# Altium PCB Board_QFP.PcbDoc (part 2 of 4)
Units mm, origin at the board's own origin, x right, y up, seen from the top; angles counter-clockwise.
Board outline 237 x 100 mm, 2 copper layers (Top Layer, Bottom Layer); 389 components, 358 nets, 1412 pads, 469 vias.
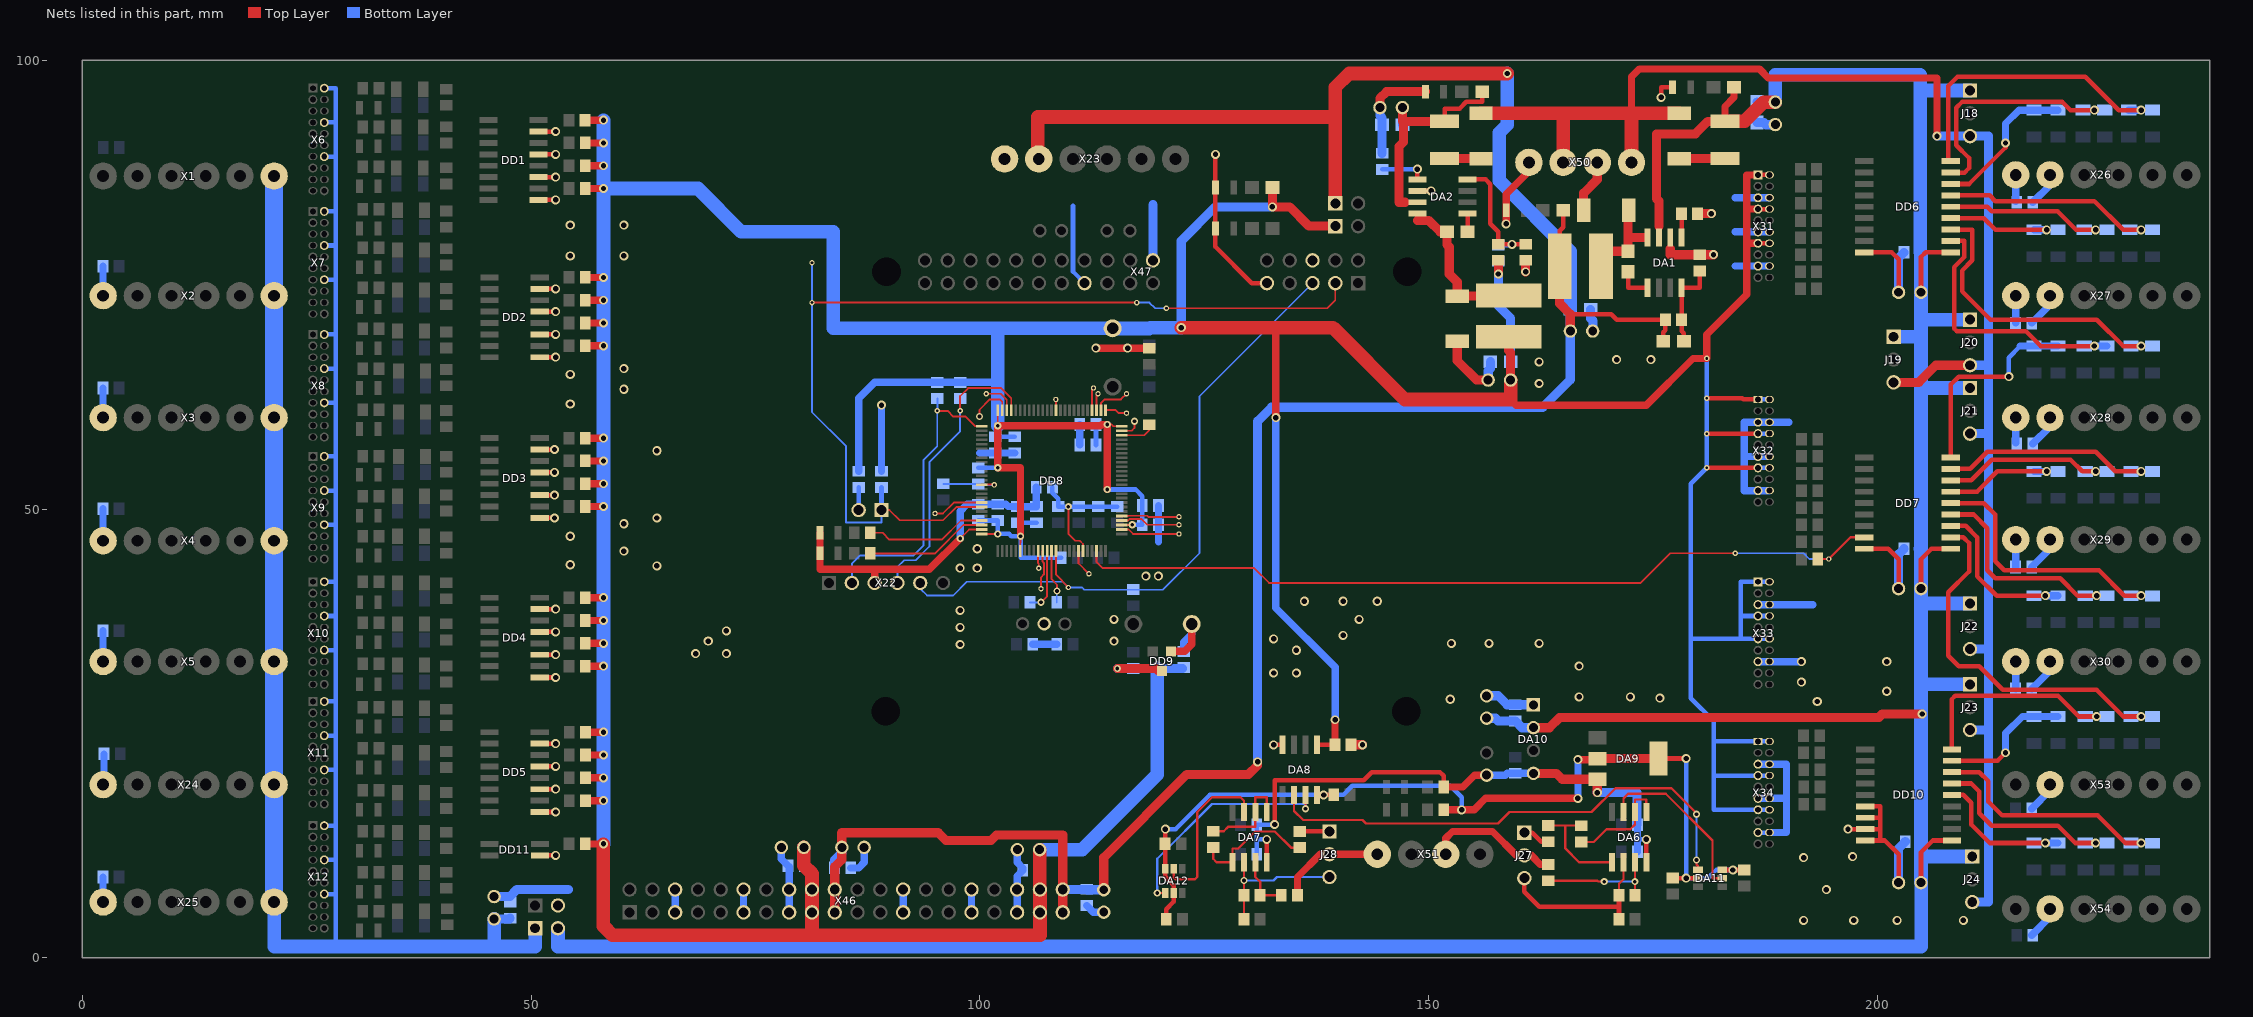
[diagram p2: the nets of this part, all layers, seen from the top]

## Via types
v1: diameter 0.6, hole 0.3, Top Layer to Bottom Layer, 149 vias
v2: diameter 0.813, hole 0.406, Top Layer to Bottom Layer, 130 vias
v3: diameter 1, hole 0.6, Top Layer to Bottom Layer, 118 vias
v4: diameter 1.016, hole 0.61, Top Layer to Bottom Layer, 72 vias

## Nets (pads, with @x,y where several pads share a name; then routed paths per layer and width w, separated by ;. In a path a pad name is that pad's centre, name@x,y a point inside that pad or via, vN(x,y) a via of type N, cw(c..) or ccw(c..) an arc to the next point about the centre after c; other vN are vias at no path point) (continued)
+3.3v: C5.1 C6.1 C15.2 C16.1 C17.1 C22.1 C23.1 C32.1 C33.1 C38.1 C39.1 C40.1 C41.1 C42.1 C43.1 C44.1 C45.1 C48.1 C59.1 DA8.1 DD8.6 DD8.28 DD8.50 DD8.75 DD8.100 DD9.3 J15.1 L2.1 R13.2 R14.2 R15.2 R28.2 R29.2 R30.2 R43.2 R44.2 R45.2 R58.2 R59.2 R60.2 R73.2 R74.2 R75.2 R125.2 R128.2 R130.2 R146.1 R148.2 R149.2 R150.2 R154.1 R171.2 R172.2 R197.2 R198.2 R199.2 R200.2 R206.2 SA2.2 X31.1 X31.2 X31.7 X31.8 X31.13 X31.14 X32.1 X32.2 X32.7 X32.8 X32.13 X32.14 X33.1 X33.2 X33.7 X33.8 X33.11 X33.12 X34.1 X34.2 X34.7 X34.8 X34.13 X34.14 X46.17 X46.18 X46.37 X46.38 | length 746.6
  Top Layer w0.203: DD8.100@100.181,47.239 101.976,47.239 v2(101.981,47.244) ; v2(101.981,59.309) DD8.75@101.981,61.039 ; DD8.6@104.481,45.339 104.481,46.268 104.521,46.308 v2(104.521,46.99) ; v2(114.173,59.436) 114.668,59.436 114.865,59.239 DD8.50@115.781,59.239 ; DD8.28@115.781,48.239 116.946,48.239 v2(116.967,48.26)
  Top Layer w0.508: DA8.1@137.541,23.749 C59.1@139.546,23.749 ; v1(180.975,54.61) X32.13@186.69,54.61 ; v1(180.975,58.42) X32.7@186.69,58.42 ; v1(180.975,62.357) 184.912,62.357 185.039,62.23 X32.1@186.69,62.23 ; X31.13@186.69,79.629 X31.14@187.96,79.629 ; X31.7@186.69,83.439 X31.8@187.96,83.439 ; X31.1@186.69,87.249 X31.2@187.96,87.249
  Top Layer w0.813: R13.2@55.998,93.352 v3@58.058,93.352 ; R200.2@56.025,12.707 58.058,12.707 v3(58.06,12.705) ; R171.2@56.025,32.519 58.058,32.519 v3(58.06,32.517) ; R75.2@56.025,35.059 58.058,35.059 v3(58.06,35.057) ; R74.2@56.025,37.599 58.058,37.599 v3(58.06,37.597) ; R73.2@56.025,40.139 58.058,40.139 v3(58.06,40.137) ; R60.2@56.025,50.299 58.058,50.299 v3(58.06,50.297) ; R59.2@56.025,52.839 58.058,52.839 v3(58.06,52.837) ; R58.2@56.025,55.379 58.058,55.379 v3(58.06,55.377) ; R45.2@56.025,57.919 58.058,57.919 v3(58.06,57.917) ; R44.2@56.025,68.206 58.058,68.206 v3(58.06,68.204) ; R43.2@56.025,70.746 v3(58.058,70.746) ; R30.2@56.025,73.286 58.058,73.286 v3(58.06,73.284) ; R29.2@56.025,75.826 58.058,75.826 v3(58.06,75.824) ; R28.2@56.025,85.732 58.058,85.732 v3(58.06,85.73) ; R15.2@56.025,88.272 58.058,88.272 v3(58.06,88.27) ; R14.2@56.025,90.812 58.058,90.812 v3(58.06,90.81) ; R199.2@56.05,17.531 v3(58.06,17.531) ; R198.2@56.05,20.071 v3(58.06,20.071) ; R197.2@56.05,22.611 v3(58.06,22.611) ; R172.2@56.05,25.151 v3(58.06,25.151) ; v2(104.521,46.99) 104.521,54.61 v2(101.981,54.61) v2(101.981,59.309) 113.411,59.309 113.538,59.436 v2(114.173,59.436) v2(114.173,52.197) ; v3(132.969,60.198) 132.969,70.231 ; C59.1@139.548,23.751 v3@139.548,26.518 ; 159.132,62.23 159.767,61.595 174.244,61.595 179.451,66.802 v1(180.975,66.802) 180.975,69.469 185.42,73.914 185.42,79.629 ; X31.13@186.69,79.629 185.42,79.629 ; X31.7@186.69,83.439 185.42,83.439 ; X31.1@186.69,87.249 185.42,87.249 185.42,83.439 ; 185.42,79.629 185.42,83.439
  Top Layer w1.016: v2(115.316,32.258) 119.634,32.258 119.939,31.953 DD9.3@120.269,31.953 ; R125.2@132.588,85.852 v3(132.588,83.693) 134.503,83.693 136.657,81.539 J15.1@139.594,81.539 ; v3(157.755,76.205) 157.757,76.207 R128.2@157.757,77.732 ; L2.1@158.898,69.22 158.898,67.696 159.132,67.462 C17.1@159.132,64.394
  Top Layer w1.524: v3@58.039,12.684 58.039,3.556 59.055,2.54 81.28,2.54 ; C22.1@80.371,12.319 80.371,10.307 81.28,9.398 X46.18@81.28,7.62 X46.17@81.28,5.08 81.28,2.54 ; X46.38@106.66,7.64 C6.1@106.66,12.065 ; X46.38@106.68,7.62 X46.37@106.68,5.08 106.68,2.54 81.28,2.54 ; v4(122.428,70.231) 132.969,70.231 139.321,70.231 147.322,62.23 159.132,62.23 C17.1@159.132,64.394
  Bottom Layer w0.508: C42.1@99.824,48.743 C43.1@101.983,48.743 v2@101.983,47.246 ; R150.2@99.824,54.607 101.978,54.607 v2(101.981,54.61) ; v2(101.981,47.244) 103.251,47.244 103.505,46.99 v2(104.521,46.99) ; C40.1@101.981,58.064 C41.1@103.884,58.064 ; C32.1@104.521,48.11 v2(104.521,46.99) ; C32.1@104.521,48.489 C33.1@106.301,48.489 ; R146.1@109.066,44.577 104.521,44.577 v2(104.521,46.99) ; C39.1@112.928,57.152 C38.1@112.928,59.438 ; C38.1@112.93,59.436 v2(114.173,59.436) ; v2(114.173,52.197) 117.348,52.197 118.085,51.46 C45.1@118.085,50.417 C44.1@118.085,48.258 118.083,48.26 v2(116.967,48.26) ; v1(180.975,66.802) v1(180.975,62.357) v1(180.975,58.42) v1(180.975,54.61) 179.197,52.832 179.197,35.56 ; 181.864,20.32 X34.7@186.69,20.32 X34.8@187.96,20.32 ; X32.13@186.69,54.61 X32.14@187.96,54.61 ; X32.7@186.69,58.42 X32.8@187.96,58.42 ; X32.1@186.69,62.23 X32.2@187.96,62.23 ; X34.14@187.96,16.51 X34.13@186.69,16.51 181.737,16.51 181.737,24.13 ; X34.2@187.96,24.13 X34.1@186.69,24.13 181.737,24.13 ; X33.12@187.96,35.56 X33.11@186.69,35.56 184.785,35.56 ; X33.8@187.96,38.1 X33.7@186.69,38.1 184.785,38.1 ; X33.2@187.96,41.91 X33.1@186.69,41.91 184.785,41.91 184.785,38.1 ; 179.197,35.56 179.197,28.956 181.737,26.416 181.737,24.13 ; 179.197,35.56 184.785,35.56 ; 184.785,35.56 184.785,38.1
  Bottom Layer w0.813: R206.2@86.489,54.226 86.489,62.359 88.262,64.132 R148.2@95.252,64.132 R149.2@97.792,64.132 101.978,64.132 ; C40.1@101.981,58.064 v2(101.981,59.309) ; v3(132.969,60.198) 132.969,38.989 139.573,32.385 v3(139.573,26.543)
  Bottom Layer w1.016: C23.1@80.416,10.289 C22.1@80.416,12.274 ; C5.1@106.578,9.781 106.66,9.863 C6.1@106.66,12.065 ; v2(115.316,32.258) R130.2@117.089,32.258 ; R130.2@117.092,32.261 119.761,32.261 C48.1@122.585,32.261 ; v4(122.428,70.231) 122.428,79.883 126.238,83.693 v3(132.588,83.693) ; C15.2@157.755,77.63 v3(157.755,76.205) 157.755,72.649 159.132,71.272 C17.1@159.132,64.394
  Bottom Layer w1.524: v3(58.06,12.705) v3(58.06,17.531) v3(58.06,20.071) v3(58.06,22.611) v3(58.06,25.151) v3(58.06,32.517) v3(58.06,35.057) v3(58.06,37.597) v3(58.06,40.137) v3(58.06,50.297) v3(58.06,52.837) v3(58.06,55.377) v3(58.06,57.917) v3(58.06,68.204) v3(58.06,73.284) v3(58.06,75.824) v3(58.06,85.73) ; v3(58.06,93.35) v3(58.06,90.81) v3(58.06,88.27) v3(58.06,85.73) ; v2(101.981,59.309) 101.981,70.153 83.644,70.153 83.644,80.899 73.406,80.899 68.575,85.73 v3(58.06,85.73) ; 102.03,70.153 SA2.2@114.779,70.153 ; C6.1@106.66,12.065 111.379,12.065 119.761,20.447 119.761,32.261 ; SA2.2@114.803,70.129 R154.1@118.87,70.129 ; R154.1@118.972,70.231 v4(122.428,70.231)
+5v: C11.1 C12.1 C13.1 C21.1 C27.1 C53.1 C54.1 J14.1 L1.1 R122.1 R124.2 X23.5 X46.19 X46.20 X46.39 X46.40 | length 286
  Top Layer w0.508: L1.1@164.592,77.089 164.592,81.01 164.994,81.412 R124.2@164.994,83.317 ; 165.776,71.74 170.348,71.74 170.968,71.12 R122.1@176.376,71.12 ; C13.1@176.149,68.707 176.149,69.723 176.378,69.952 R122.1@176.378,71.122
  Top Layer w1.016: X46.19@83.82,5.08 X46.20@83.82,7.62 83.82,10.16 84.602,10.942 C27.1@84.602,12.319 84.602,13.95 95.357,13.95 96.226,13.081 101.219,13.081 101.854,13.716 109.22,13.716 X46.40@109.22,7.62 X46.39@109.22,5.08 ; C12.1@113.792,7.6 113.792,11.176 123.063,20.447 129.921,20.447 130.937,21.463 v3(130.937,21.844) ; L1.1@164.592,77.089 164.592,72.924 165.776,71.74 C21.1@165.776,69.855
  Top Layer w1.524: X23.5@106.447,89.133 106.447,93.705 139.594,93.705 ; J14.1@139.594,84.079 139.594,93.705 ; v3(158.75,98.552) 141.139,98.552 139.594,97.007 139.594,93.705
  Bottom Layer w1.016: C53.1@83.795,10.031 83.795,10.897 84.602,11.704 C27.1@84.602,12.319 ; X46.40@109.245,7.645 C54.1@111.885,7.645 111.93,7.6 C12.1@113.792,7.6 ; v3(130.937,21.844) 130.937,59.804 132.489,61.356 162.702,61.356 165.776,64.43 C21.1@165.776,69.855 ; C21.1@165.756,69.875 C11.1@165.756,72.268
  Bottom Layer w1.524: v3(158.75,98.552) 158.75,92.837 157.861,91.948 157.861,86.614 165.756,78.719 C11.1@165.756,72.268
+5V_1: C60.1 C63.1 C64.1 C65.1 C66.1 DA8.8 DA9.2 DA9.4 DA11.2 DA11.6 DA12.2 DA12.6 R139.1 | length 104.8
  Top Layer w0.508: C66.1@120.625,12.702 120.625,9.042 121.6,8.067 DA12.2@121.6,7.239 121.6,6.284 120.752,5.436 C65.1@120.752,4.32 ; C66.1@120.65,12.727 v3(120.65,14.351) ; v3(138.303,18.161) C60.1@139.419,18.161 ; DA9.4@175.597,22.225 v3(178.689,22.225) ; C64.1@177.167,8.915 177.192,8.89 v3(178.689,8.89) DA11.2@180.006,8.89 ; DA11.6@182.706,9.84 182.742,9.804 v3(183.896,9.804) C63.1@185.168,9.804
  Top Layer w0.813: R139.1@151.663,16.508 155.065,16.508 156.337,17.78 v3(166.624,17.78) ; v3(166.624,22.098) DA9.2@168.67,22.098
  Top Layer w1.016: DA9.2@168.783,22.211 DA9.4@175.583,22.211
  Bottom Layer w0.508: v3(120.65,14.351) 121.793,14.351 125.603,18.161 v3(138.303,18.161) 140.462,18.161 141.478,19.177 152.4,19.177 153.67,17.907 v3(153.67,16.51) ; v3(178.689,22.225) v3(178.689,8.89) 181.102,8.89 182.016,9.804 v3(183.896,9.804)
  Bottom Layer w0.813: v3(166.624,17.78) v3(166.624,22.098)
+12V_1: C25.1 C55.1 C56.1 C57.1 C58.1 C62.1 DA6.8 DA7.8 DA9.3 DA10.4 R140.1 | length 68.6
  Top Layer w0.508: DA7.8@131.953,10.668 v3(131.953,13.208) ; v3(132.836,14.874) 132.842,14.88 132.842,19.812 142.748,19.812 143.637,20.701 151.257,20.701 151.663,20.295 R140.1@151.663,19.048 ; DA6.8@174.244,10.668 v3(174.244,13.208)
  Top Layer w0.813: R140.1@151.663,19.048 153.795,19.048 155.108,20.361 C25.1@156.459,20.361
  Top Layer w1.016: DA10.4@161.671,20.574 164.211,20.574 164.874,19.911 DA9.3@168.783,19.911 v3(168.783,18.415)
  Bottom Layer w0.508: C56.1@130.835,11.559 C55.1@130.835,14.861 132.823,14.861 v3(132.836,14.874) ; 130.837,13.208 v3(131.953,13.208) ; 173.253,13.208 v3(174.244,13.208)
  Bottom Layer w0.813: C25.1@156.459,20.361 158.537,20.361 158.746,20.57 C62.1@159.636,20.57 DA10.4@161.667,20.57 ; C57.1@173.253,11.813 173.253,13.208 C58.1@173.253,14.861
  Bottom Layer w1.016: v3(168.783,18.415) 173.228,18.415 C58.1@173.228,14.886
+24-in: J18.3 J19.3 J20.3 J21.3 J22.3 J23.3 J24.3 VD34.2 VD35.2 X50.1 X50.3 | length 188.8
  Top Layer w0.813: 172.593,94.107 172.593,98.171 173.482,99.06 186.817,99.06 187.833,98.044 206.629,98.044 v3(206.629,91.567)
  Top Layer w1.016: J19.3@201.803,64.135 204.597,64.135 206.502,66.04 J20.3@210.312,66.04
  Top Layer w1.524: VD35.2@155.829,94.107 164.973,94.107 ; X50.3@164.973,88.646 164.973,94.107 ; X50.1@172.593,88.646 172.593,94.107 ; VD34.2@177.927,94.107 172.593,94.107 ; 164.973,94.107 172.593,94.107
  Bottom Layer w1.016: v3(206.629,91.567) J18.3@210.312,91.567 212.365,91.567 212.365,66.04 ; J23.3@210.312,25.4 212.365,25.4 ; J22.3@210.312,34.417 212.365,34.417 ; J21.3@210.312,58.42 212.365,58.42 ; J20.3@210.312,66.04 212.365,66.04 ; J24.3@210.566,6.223 212.344,6.223 212.365,6.244 212.365,25.4 ; 212.365,25.4 212.365,34.417 ; 212.365,34.417 212.365,58.42 ; 212.365,58.42 212.365,66.04
+24_3: C19.1 C20.1 DA2.7 FU2.1 R126.2 | length 26.4
  Top Layer w0.508: 147.341,84.206 DA2.7@148.738,84.206 ; FU2.1@151.765,93.218 151.765,94.62 153.437,94.62 154.199,95.382 155.977,95.382 R126.2@155.977,96.525
  Top Layer w1.016: C19.1@147.067,94.747 147.067,93.243 147.087,93.223 147.204,93.223 ; 147.341,84.206 146.706,84.206 146.706,90.429 147.204,90.927 147.204,93.223 ; FU2.1@151.765,93.218 147.209,93.218 147.204,93.223
  Bottom Layer w1.016: C20.1@147.087,92.842 C19.1@147.087,94.727
+24_5: 
+24v: C1.1 C2.1 C3.1 C4.1 C7.1 C9.1 C10.1 C24.1 C50.1 C61.1 DA1.7 DA10.2 DD6.10 DD7.10 DD10.10 FU1.1 J18.1 J19.1 J20.1 J21.1 J22.1 J23.1 J24.1 R121.2 X21.2 | length 410.3
  Top Layer w0.508: DA1.7@175.641,80.264 175.641,81.534 ; C7.1@204.852,8.387 204.852,11.796 206.142,13.086 DD10.10@208.301,13.086 ; C3.1@204.852,41.153 204.852,44.435 206.015,45.598 DD7.10@208.174,45.598 ; C2.1@204.852,74.173 204.852,78.106 205.364,78.618 DD6.10@208.174,78.618
  Top Layer w0.813: FU1.1@183.007,93.218 183.007,94.869 184.023,95.885 R121.2@184.023,97.028
  Top Layer w1.016: DA10.2@161.671,25.654 163.449,25.654 164.592,26.797 200.152,26.797 200.533,27.178 v3(204.974,27.178) ; 175.641,81.534 175.641,84.333 175.387,84.587 175.387,91.821 179.705,91.821 181.102,93.218 FU1.1@183.007,93.218
  Top Layer w1.524: FU1.1@183.007,93.218 185.196,93.218 187.34,95.362 C10.1@188.616,95.362
  Bottom Layer w1.016: C24.1@156.459,26.711 157.439,26.711 157.738,26.412 C61.1@159.636,26.412 160.394,25.654 DA10.2@161.671,25.654 ; C9.1@186.604,95.362 C10.1@188.616,95.362
  Bottom Layer w1.524: X21.2@52.98,3.307 52.98,1.27 204.867,1.27 C7.1@204.867,8.372 ; C10.1@188.616,95.362 188.616,98.404 188.595,98.425 204.745,98.425 ; J19.1@201.803,69.215 204.725,69.215 ; C1.1@204.77,78.62 204.77,96.647 ; 204.77,98.273 204.77,96.647 ; C7.1@204.852,8.387 204.852,11.303 ; C1.1@204.852,78.538 C2.1@204.852,74.173 204.852,71.12 ; J23.1@210.312,30.48 204.852,30.48 ; J22.1@210.312,39.497 204.852,39.497 ; J21.1@210.312,63.5 204.852,63.5 ; J20.1@210.312,71.12 204.852,71.12 ; J18.1@210.312,96.647 204.77,96.647 ; J24.1@210.566,11.303 204.852,11.303 ; 204.852,11.303 204.852,30.48 ; 204.852,30.48 204.852,39.497 ; 204.852,39.497 C3.1@204.852,41.153 204.852,45.518 C4.1@204.77,45.6 204.852,45.682 204.852,63.5 ; 204.852,63.5 204.852,71.12
+24v_1: C51.1 C52.1 X1.1 X2.1 X3.1 X4.1 X5.1 X6.2 X6.8 X6.14 X7.2 X7.8 X7.14 X8.2 X8.8 X8.14 X9.2 X9.8 X9.14 X10.2 X10.8 X10.14 X11.2 X11.8 X11.14 X12.2 X12.8 X12.14 X21.1 X24.1 X25.1 | length 244
  Bottom Layer w0.508: X12.14@26.945,7.117 28.215,7.117 ; X12.8@26.945,10.927 28.215,10.927 ; X12.2@26.945,14.737 28.215,14.737 ; X11.14@26.945,20.96 28.215,20.96 ; X11.8@26.945,24.77 28.215,24.77 ; X11.2@26.945,28.58 28.215,28.58 ; X10.14@26.945,34.295 28.215,34.295 ; X10.8@26.945,38.105 28.215,38.105 ; X10.2@26.945,41.915 28.215,41.915 ; X9.14@26.945,48.265 28.215,48.265 ; X9.8@26.945,52.075 28.215,52.075 ; X9.2@26.945,55.885 28.215,55.885 ; X8.14@26.945,61.854 28.215,61.854 ; X8.8@26.945,65.664 28.215,65.664 ; X8.2@26.945,69.474 28.215,69.474 ; X7.14@26.945,75.57 28.215,75.57 ; X7.8@26.945,79.38 28.215,79.38 ; X7.2@26.945,83.19 28.215,83.19 ; X6.14@26.945,89.286 28.215,89.286 ; X6.8@26.945,93.096 28.215,93.096 ; X6.2@26.945,96.906 28.215,96.906 28.215,93.096 ; 28.215,1.402 28.215,7.117 ; 28.215,7.117 28.215,10.927 ; 28.215,10.927 28.215,14.737 ; 28.215,14.737 28.215,20.96 ; 28.215,20.96 28.215,24.77 ; 28.215,24.77 28.215,28.58 ; 28.215,28.58 28.215,34.295 ; 28.215,34.295 28.215,38.105 ; 28.215,38.105 28.215,41.915 ; 28.215,41.915 28.215,48.265 ; 28.215,48.265 28.215,52.075 ; 28.215,52.075 28.215,55.885 ; 28.215,55.885 28.215,61.854 ; 28.215,61.854 28.215,65.664 ; 28.215,65.664 28.215,69.474 ; 28.215,69.474 28.215,75.57 ; 28.215,75.57 28.215,79.38 ; 28.215,79.38 28.215,83.19 ; 28.215,83.19 28.215,89.286 ; 28.215,89.286 28.215,93.096
  Bottom Layer w1.016: C51.1@45.868,4.343 47.566,4.343 C52.1@47.648,4.425
  Bottom Layer w1.524: X25.1@21.357,6.228 21.357,1.275 45.868,1.275 ; C51.1@45.868,4.343 45.868,1.275 ; X21.1@50.44,3.307 50.44,1.275 45.868,1.275
  Bottom Layer w2: X5.1@21.336,33.025 X1.1@21.336,87.127 ; X25.1@21.357,6.228 X24.1@21.357,19.309 X5.1@21.357,33.025
A_: DA8.7 DA12.1 | length 25.8
  Top Layer w0.254: v2(119.761,7.239) DA12.1@120.65,7.239 ; v2(136.271,16.637) DA8.7@136.271,18.161
  Bottom Layer w0.254: v2(119.761,7.239) 119.761,11.049 125.857,17.145 136.271,17.145 v2(136.271,16.637)
B_: DA8.6 DA11.1 | length 56.6
  Top Layer w0.254: DA8.6@135.001,18.161 135.001,16.383 136.017,15.367 142.621,15.367 143.002,14.986 157.734,14.986 159.004,16.256 168.148,16.256 170.815,18.923 177.038,18.923 179.959,16.002 v2(179.832,16.002) ; v2(179.832,10.922) 179.832,10.414 180.006,10.24 DA11.1@180.006,9.84 DA11.1@179.94,9.906
  Bottom Layer w0.254: v2(179.832,10.922) v2(179.832,16.002)
Boot_0: DD8.94 J13.1 R157.1 X47.3 | length 111.5
  Top Layer w0.203: v1(81.28,73.025) v1(117.475,73.025) ; J13.1@89.027,49.911 89.916,49.911 91.059,48.768 95.885,48.768 97.356,50.239 DD8.94@100.181,50.239 ; v1(120.777,72.39) 138.684,72.39 139.594,73.3 X47.3@139.594,75.189
  Bottom Layer w0.203: v1(81.28,77.47) v1(81.28,73.025) 81.28,60.833 85.09,57.023 85.09,48.514 89.027,48.514 J13.1@89.027,49.911 ; v1(117.475,73.025) 118.872,73.025 119.507,72.39 v1(120.777,72.39)
  Bottom Layer w0.508: J13.1@89.027,49.911 89.029,49.913 R157.1@89.029,52.426
d6-10: 
d6-11: DD6.11 R105.2 R106.2 | length 29.6
  Top Layer w0.508: DD6.11@208.174,79.888 209.672,79.888 209.677,79.883 209.677,78.105 208.534,76.962 208.534,70.13 208.814,69.85 216.535,69.85 218.205,68.18 v3(224.176,68.18)
  Bottom Layer w0.813: v3(224.176,68.18) R105.2@225.573,68.18
d6-12: DD6.12 R103.2 R104.2 | length 32.2
  Top Layer w0.508: DD6.12@208.174,81.158 210.561,81.158 210.561,77.724 209.423,76.586 209.423,74.295 212.593,71.125 224.43,71.125 227.375,68.18 v3(229.383,68.18)
d6-13: DD6.13 R101.2 R102.2 | length 12.6
  Top Layer w0.508: DD6.13@208.174,82.428 211.857,82.428 213.151,81.134 v3(218.842,81.134)
  Bottom Layer w0.813: R101.2@217.445,81.134 v3(218.842,81.134)
d6-14: DD6.14 R132.2 R133.2 | length 17.2
  Top Layer w0.508: DD6.14@208.174,83.698 212.238,83.698 212.746,83.19 220.064,83.19 222.12,81.134 v3(224.303,81.134)
d6-15: DD6.15 R97.2 R98.2 | length 22.8
  Top Layer w0.508: DD6.15@208.174,84.968 212.492,84.968 213.127,84.333 224.176,84.333 227.375,81.134 v3(229.383,81.134)
d6-16: DD6.16 R95.2 R96.2 | length 16.9
  Top Layer w0.508: DD6.16@208.174,86.238 210.206,86.238 214.27,90.302 v3(214.27,90.81)
  Bottom Layer w0.813: v3(214.27,90.81) 214.27,92.969 215.77,94.469 R95.2@217.445,94.469 R96.2@220.112,94.469
d6-17: DD6.17 R63.2@222.906,94.469 R94.2 | length 25.6
  Top Layer w0.508: DD6.17@208.174,87.508 209.698,87.508 210.206,88.016 210.206,89.133 208.788,90.551 208.788,94.742 209.423,95.377 220.599,95.377 221.507,94.469 v3(224.176,94.469)
d6-18: DD6.18 R77.2 R78.2 | length 33.3
  Top Layer w0.508: DD6.18@208.174,88.778 207.899,89.053 207.899,97.155 208.915,98.171 223.165,98.171 226.867,94.469 v3(229.383,94.469)
  Bottom Layer w0.813: R77.2@227.986,94.469 v3(229.383,94.469)
d7-11: DD7.11 R134.2 R135.2 | length 40.1
  Top Layer w0.508: DD7.11@208.174,46.868 209.571,46.868 210.206,46.233 210.206,43.058 207.899,40.751 207.899,33.655 209.042,32.512 211.328,32.512 213.972,29.868 224.412,29.868 227.375,26.905 v3(229.383,26.905)
d7-12: DD7.12 R119.2 R120.2 | length 17.7
  Top Layer w0.508: DD7.12@208.174,48.138 209.825,48.138 211.095,46.868 211.095,42.55 213.278,40.367 v3(218.715,40.367)
  Bottom Layer w0.813: v3(218.715,40.367) R119.2@220.112,40.367
d7-13: DD7.13 R117.2 R118.2 | length 22.8
  Top Layer w0.508: DD7.13@208.174,49.408 210.714,49.408 212.238,47.884 212.238,43.185 213.127,42.296 220.366,42.296 222.295,40.367 v3(224.43,40.367)
d7-14: DD7.14 R115.2 R116.2 | length 28.5
  Top Layer w0.508: DD7.14@208.174,50.678 211.857,50.678 213.127,49.408 213.127,44.201 214.143,43.185 224.684,43.185 227.502,40.367 v3(229.383,40.367)
d7-15: DD7.15 R113.2 R114.2 | length 13
  Top Layer w0.508: DD7.15@208.174,51.948 211.095,51.948 213.357,54.21 v3(218.842,54.21)
  Bottom Layer w0.813: R114.2@217.445,54.21 v3(218.842,54.21)
d7-16: DD7.16 R111.2 R112.2 | length 17.6
  Top Layer w0.508: DD7.16@208.174,53.218 210.46,53.218 212.746,55.504 221.509,55.504 222.803,54.21 v3(224.303,54.21)
d7-17: DD7.17 R109.2 R110.2 | length 22.9
  Top Layer w0.508: DD7.17@208.174,54.488 210.333,54.488 212.238,56.393 224.303,56.393 226.486,54.21 v3(229.383,54.21)
d7-18: DD7.18 R107.2 R108.2 | length 23.1
  Top Layer w0.508: DD7.18@208.174,55.758 208.174,63.902 209.042,64.77 v3(214.63,64.77)
  Bottom Layer w0.508: v3(214.63,64.77) 214.63,66.891 215.919,68.18
  Bottom Layer w0.813: 215.919,68.18 R108.2@217.445,68.18 R107.2@220.112,68.18
d10-14: DD10.14 R166.2 R167.2 | length 15.4
  Top Layer w0.508: DD10.14@208.301,18.166 209.571,18.166 210.46,17.277 210.46,14.864 212.516,12.808 v3(218.715,12.808)
  Bottom Layer w0.813: v3(218.715,12.808) R166.2@220.112,12.808
d10-15: DD10.15 R164.2 R165.2 | length 20.2
  Top Layer w0.508: DD10.15@208.301,19.436 210.46,19.436 211.349,18.547 211.349,16.134 212.746,14.737 220.112,14.737 222.041,12.808 v3(224.303,12.808)
d10-16: DD10.16 R162.2 R163.2 | length 25.7
  Top Layer w0.508: DD10.16@208.301,20.706 211.349,20.706 212.365,19.69 212.365,17.404 213.889,15.88 224.557,15.88 227.629,12.808 v3(229.383,12.808)
d10-17: DD10.17 R160.2 R161.2 | length 15.1
  Top Layer w0.508: DD10.17@208.301,21.976 213.381,21.976 v3(214.27,22.865)
  Bottom Layer w0.813: v3(214.27,22.865) 214.27,25.024 216.151,26.905 R161.2@217.445,26.905 R160.2@220.112,26.905
d10-18: DD10.18 R136.2 R159.2 | length 22.8
  Top Layer w0.508: DD10.18@208.301,23.246 208.301,28.85 208.661,29.21 220.117,29.21 222.422,26.905 v3(224.43,26.905)
da1-1: C14.1 DA1.1 | length 3.9
  Top Layer w0.508: C14.1@172.212,76.454 172.212,74.676 DA1.1@174.371,74.676
da1-4: C13.2 DA1.4 R122.2 R123.1 | length 10
  Top Layer w0.508: C13.2@178.435,68.707 178.435,69.596 178.181,69.85 DA1.4@178.181,74.676 180.213,74.676 180.211,74.678 R123.1@180.211,76.556
da1-5: DA1.5 J11.1 | length 2.6
  Top Layer w0.508: DA1.5@178.181,80.264 J11.1@178.181,82.908
da1-8: C14.2 DA1.8 L1.2 VD31.1 | length 9.7
  Top Layer w0.508: 173.99,80.264 DA1.8@174.371,80.264
  Top Layer w1.016: L1.2@169.251,78.74 C14.2@172.212,78.74 172.212,80.264 ; VD31.1@172.212,83.298 172.212,80.264 ; 173.99,80.264 172.212,80.264
da2-1: C18.1 DA2.1 | length 2
  Top Layer w0.508: C18.1@154.326,80.904 DA2.1@154.326,82.936
da2-4: C15.1 DA2.4 R127.1 R128.1 | length 14.4
  Top Layer w0.508: DA2.4@154.326,86.746 156.332,86.746 156.866,86.212 156.866,81.793 157.757,80.902 R128.1@157.757,79.532 R127.1@160.805,79.532
  Bottom Layer w0.508: C15.1@157.755,79.43 159.202,79.43 v3(159.279,79.507)
da2-5: DA2.5 J12.1 | length 5.1
  Top Layer w0.508: DA2.5@148.738,86.746 v3(148.738,87.889)
  Bottom Layer w0.508: J12.1@144.828,87.889 v3(148.738,87.889)
da2-8: C18.2 DA2.8 L2.2 VD40.1 | length 18
  Top Layer w0.508: 148.738,82.174 DA2.8@148.738,82.936
  Top Layer w1.016: 148.738,82.174 150.008,82.174 151.278,80.904 C18.2@152.04,80.904 152.04,79.481 152.294,79.227 152.294,76.205 153.183,75.316 VD40.1@153.183,73.752 158.83,73.752 L2.2@158.898,73.82
da6-1: DA6.1 DA6.2 R204.1 | length 12.2
  Top Layer w0.254: R204.1@167.003,12.929 168.377,12.929 169.799,14.351 172.466,14.351 172.974,14.859 DA6.2@172.974,16.256 172.974,17.653 174.244,17.653 DA6.1@174.244,16.256
da6-3: DA6.3 DA11.5 | length 19.1
  Top Layer w0.254: DA6.3@171.704,16.256 171.704,17.78 172.212,18.288 176.403,18.288 181.61,13.081 181.61,8.89 DA11.5@182.706,8.89
da6-5: DA6.5 R201.1 R204.2 | length 12.1
  Top Layer w0.254: R201.1@163.324,14.757 165.227,14.757 ; R204.2@166.975,14.757 165.227,14.757 ; DA6.5@170.434,10.668 166.751,10.668 165.227,12.192 165.227,14.757
da6-6: DA6.6 J27.3 R158.2 R205.2 | length 19.3
  Top Layer w0.254: R158.2@171.199,6.983 171.199,8.258 171.704,8.763 DA6.6@171.704,10.668
  Top Layer w0.508: J27.3@160.655,8.89 160.655,7.366 162.306,5.715 171.199,5.715 ; R205.2@171.199,4.316 171.199,5.715 ; R158.2@171.199,6.983 171.199,5.715
da6-7: DA6.7 R138.1 R158.1 | length 13.4
  Top Layer w0.254: R138.1@163.32,8.611 168.808,8.611 168.91,8.509 v2(169.545,8.509) ; R158.1@172.974,7.008 v2(172.974,8.509) DA6.7@172.974,10.668
  Bottom Layer w0.254: v2(169.545,8.509) v2(172.974,8.509)
da7-1: DA7.1 DA7.2 R203.1 | length 11.1
  Top Layer w0.254: R203.1@125.986,14.122 127.152,14.122 127.635,14.605 130.683,14.605 DA7.2@130.683,16.256 130.683,17.907 131.953,17.907 DA7.1@131.953,16.256
da7-3: DA7.3 DA12.5 | length 18.3
  Top Layer w0.254: DA12.5@121.6,9.939 121.6,8.956 121.793,8.763 123.952,8.763 124.206,9.017 124.206,16.256 125.857,17.907 129.032,17.907 129.413,17.526 DA7.3@129.413,16.256
da7-5: DA7.5 R202.1 R203.2 | length 14.1
  Top Layer w0.254: R203.2@125.986,12.322 125.986,11.047 126.365,10.668 DA7.5@128.143,10.668 128.143,12.192 128.778,12.192 130.683,14.097 132.842,14.097 134.645,12.294 R202.1@135.634,12.294
da7-6: DA7.6 J28.3 R141.2 R142.2 | length 16
  Top Layer w0.254: R142.2@129.413,6.986 v2(129.413,8.636) DA7.6@129.413,10.668 ; R141.2@129.416,4.316 R142.2@129.416,6.983
  Bottom Layer w0.254: v2(129.413,8.636) 132.715,8.636 133.096,9.017 J28.3@138.938,9.017
da7-7: DA7.7 R137.1 R142.1 | length 6.3
  Top Layer w0.254: DA7.7@130.683,10.668 130.683,9.017 131.216,8.484 R142.1@131.216,6.983 R137.1@133.575,6.983
fu1: FU1.2 VD34.1 | length 5.1
  Top Layer w1.016: VD34.1@177.927,89.067 FU1.2@182.996,89.067
fu2: FU2.2 VD35.1 | length 4.1
  Top Layer w1.016: FU2.2@151.765,89.078 VD35.1@155.818,89.078
gnd: C1.2 C2.2 C3.2 C4.2 C5.2 C6.2 C7.2 C9.2 C10.2 C11.2 C12.2 C16.2 C17.2 C19.2 C20.2 C21.2 C22.2 C23.2 C24.2 C27.2 C32.2 C33.2 C38.2 C39.2 C40.2 C41.2 C42.2 C43.2 C44.2 C45.2 C46.2 C47.2 C48.2 C50.2 C51.2 C52.2 C53.2 C54.2 C59.2 C61.2 DA1.6 DA2.6 DA8.4 DA10.1 DD1.9 DD1.11 DD1.13 DD1.15 DD2.9 DD2.11 DD2.13 DD2.15 DD3.9 DD3.11 DD3.13 DD3.15 DD4.9 DD4.11 DD4.13 DD4.15 DD5.9 DD5.11 DD5.13 DD5.15 DD6.9 DD7.9 DD8.49 DD8.74 DD8.99 DD9.1 DD10.6 DD10.7 DD10.8 DD10.9 DD11.3 J6.2 J7.2 J8.2 J9.2 J10.2 J11.2 J12.2 J16.2 J17.2 pad.0 R123.2 R127.2 R144.1 R156.2 R157.2 SA1.2 VD31.2 VD36.2 VD37.2 VD38.2 VD39.2 VD40.2 VD41.1 VD42.1 VD43.1 X22.3 X23.6 X26.5 X27.5 X28.5 X29.5 X30.5 X31.5 X31.6 X31.11 X31.12 X31.17 X31.18 X32.5 X32.6 X32.11 X32.12 X32.17 X32.18 X33.5 X33.6 X33.15 X33.16 X34.5 X34.6 X34.11 X34.12 X34.17 X34.18 X46.5 X46.6 X46.11 X46.12 X46.15 X46.16 X46.25 X46.26 X46.31 X46.32 X46.35 X46.36 X47.6 X47.9 X47.20 X47.25 X50.2 X50.4 X52.2 X53.5 X54.5 | length 383.5
  Top Layer w0.203: v2(97.79,46.736) 98.793,47.739 DD8.99@100.181,47.739 ; v2(99.949,60.325) 99.949,61.087 101.092,62.23 102.219,62.23 102.481,61.968 DD8.74@102.481,61.039 ; DD8.49@115.781,58.739 116.905,58.739 117.221,59.055 v2(117.221,59.817)
  Top Layer w0.305: 176.911,78.994 DA1.6@176.911,80.264
  Top Layer w0.508: DD1.9@50.821,84.46 v3(52.726,84.46) ; DD1.11@50.821,87 v3(52.726,87) ; DD1.13@50.821,89.54 v3(52.726,89.54) ; DD1.15@50.821,92.08 v3(52.726,92.08) ; DD5.9@50.948,16.261 v3(52.726,16.261) ; DD5.11@50.948,18.801 v3(52.726,18.801) ; DD5.13@50.948,21.341 v3(52.726,21.341) ; DD5.15@50.948,23.881 v3(52.726,23.881) ; DD4.9@50.948,31.247 v3(52.726,31.247) ; DD4.11@50.948,33.787 v3(52.726,33.787) ; DD4.13@50.948,36.327 v3(52.726,36.327) ; DD4.15@50.948,38.867 v3(52.726,38.867) ; DD3.9@50.948,49.027 v3(52.599,49.027) ; DD3.11@50.948,51.567 v3(52.599,51.567) ; DD3.13@50.948,54.107 v3(52.599,54.107) ; DD3.15@50.948,56.647 v3(52.599,56.647) ; DD2.9@50.948,66.934 v3(52.726,66.934) ; DD2.11@50.948,69.474 v3(52.726,69.474) ; DD2.13@50.948,72.014 v3(52.726,72.014) ; DD2.15@50.948,74.554 v3(52.726,74.554) ; DD11.3@50.954,11.435 v3(52.726,11.435) ; v3(126.238,89.535) VD38.2@126.238,85.852 VD43.1@126.238,81.28 126.238,79.248 130.297,75.189 X47.9@131.974,75.189 ; v3(132.715,23.749) DA8.4@133.731,23.749 ; DA2.6@148.738,85.476 v3(150.262,85.476) ; v3(175.895,95.885) 175.895,97.028 VD36.2@177.165,97.028 ; v3(196.723,14.351) 196.728,14.356 DD10.8@198.649,14.356 200.3,14.356 ; DD7.9@198.522,45.598 201.189,45.598 202.352,44.435 C3.2@202.352,41.153 ; DD6.9@198.522,78.618 201.57,78.618 202.352,77.836 C2.2@202.352,74.173 ; DD10.9@198.649,13.086 200.3,13.086 ; DD10.7@198.649,15.626 200.3,15.626 ; DD10.6@198.649,16.896 200.3,16.896 200.3,15.626 ; C7.2@202.352,8.387 202.352,11.542 200.808,13.086 200.3,13.086 ; 200.3,13.086 200.3,14.356 ; 200.3,14.356 200.3,15.626
  Top Layer w0.813: VD42.1@82.169,47.371 VD41.1@82.169,45.085 82.169,43.307 88.265,43.307 ; X22.3@88.265,41.783 88.265,43.307 ; v2(97.79,46.736) 94.361,43.307 88.265,43.307 ; v3(112.903,67.945) v3(116.459,67.945) 116.462,67.942 R156.2@118.87,67.942 ; DD9.1@121.285,34.163 122.809,34.163 123.594,34.948 SA1.2@123.594,37.211 ; v3(158.623,81.788) 158.644,81.809 VD37.2@158.644,83.317 158.644,85.111 161.163,87.63 X50.4@161.163,88.646
  Top Layer w1.016: C59.2@141.348,23.751 142.619,23.751 v3(142.621,23.749) ; C19.2@144.567,94.747 144.567,95.783 145.309,96.525 VD39.2@149.627,96.525 ; VD40.2@153.183,68.712 153.183,66.553 155.342,64.394 C17.2@156.632,64.394 ; v3(160.803,76.459) 160.805,76.461 R127.2@160.805,77.732 ; VD31.2@167.259,83.312 167.259,85.217 168.783,86.741 X50.2@168.783,88.646 ; 176.911,78.994 176.911,78.359 R123.2@180.208,78.359 ; J11.2@179.956,82.933 181.481,82.933 v3(181.483,82.931) ; R123.2@180.211,78.356 181.734,78.356 v3(181.737,78.359)
  Bottom Layer w0.508: 110.363,83.82 110.363,76.48 X47.25@111.654,75.189 ; X34.17@186.69,13.97 X34.18@187.96,13.97
  Bottom Layer w0.813: X46.5@66.04,5.08 X46.6@66.04,7.62 ; X46.11@73.66,5.08 X46.12@73.66,7.62 ; C22.2@77.871,12.319 77.871,11.034 C23.2@78.616,10.289 78.74,10.165 X46.16@78.74,7.62 X46.15@78.74,5.08 ; C53.2@85.595,10.031 86.485,10.031 87.102,10.648 C27.2@87.102,12.319 ; R157.2@89.029,54.226 v3@89.029,61.593 ; X46.25@91.44,5.08 X46.26@91.44,7.62 ; v2(97.79,46.736) 97.79,49.784 98.549,50.543 C42.2@99.824,50.543 C43.2@101.983,50.543 101.986,50.546 102.87,50.546 103.124,50.292 C32.2@104.139,50.292 ; X46.31@99.06,5.08 X46.32@99.06,7.62 ; 99.952,56.264 C40.2@101.725,56.264 C41.2@103.884,56.264 ; X46.35@104.14,5.08 X46.36@104.14,7.62 104.14,9.143 C5.2@104.778,9.781 104.778,10.03 104.14,10.668 C6.2@104.14,12.045 ; C32.2@104.142,50.289 C33.2@106.301,50.289 106.274,50.316 R144.1@106.274,52.449 ; C46.2@105.886,34.949 C47.2@108.555,34.949 ; C39.2@111.128,57.152 C38.2@111.128,59.438 ; C54.2@111.885,5.845 112.63,5.1 C12.2@113.792,5.1 ; C45.2@119.885,50.417 C44.2@119.885,48.258 119.885,46.358 119.888,46.355 ; C48.2@122.684,34.16 122.684,35.181 123.594,36.091 SA1.2@123.594,37.211 ; 184.15,77.089 X31.17@186.69,77.089 X31.18@187.96,77.089 ; 184.15,80.899 X31.11@186.69,80.899 X31.12@187.96,80.899 ; 184.15,84.709 X31.5@186.69,84.709 X31.6@187.96,84.709 ; X34.11@186.69,17.78 X34.12@187.96,17.78 189.865,17.78 ; X34.5@186.69,21.59 X34.6@187.96,21.59 189.865,21.59 189.865,17.78 ; X33.15@186.69,33.02 X33.16@187.96,33.02 v4@191.262,33.02 ; X33.5@186.69,39.37 X33.6@187.96,39.37 192.786,39.37 ; X34.18@187.96,13.97 189.865,13.97 189.865,17.78 ; X32.18@187.96,52.07 X32.17@186.69,52.07 185.166,52.07 185.166,55.88 ; X32.12@187.96,55.88 X32.11@186.69,55.88 185.166,55.88 ; 190.119,59.69 X32.6@187.96,59.69 X32.5@186.69,59.69 185.166,59.69 185.166,55.88 ; J17.2@217.188,2.543 219.223,4.578 X54.5@219.223,5.466 ; J16.2@217.188,16.64 X53.5@219.223,18.675 ; J10.2@217.188,29.975 X30.5@219.223,32.01 ; J9.2@217.188,43.564 219.223,45.599 X29.5@219.223,46.614 ; J7.2@217.188,70.742 219.223,72.777 X27.5@219.223,73.792 ; J8.2@217.315,57.28 219.223,59.188 X28.5@219.223,60.203 ; J6.2@217.315,84.204 219.223,86.112 X26.5@219.223,87.254 ; X53.5@219.223,18.421 X53.5@219.223,18.675 ; X53.5@219.223,19.309 X53.5@219.223,18.675 ; X30.5@219.223,31.883 X30.5@219.223,32.01 ; X30.5@219.223,33.025 X30.5@219.223,32.01
  Bottom Layer w1.016: C51.2@45.868,6.843 47.626,6.843 48.408,7.625 54.123,7.625 ; X47.20@119.274,77.729 119.274,83.926 ; C19.2@144.567,94.747 144.567,93.838 144.801,93.604 C20.2@144.801,92.842 ; J12.2@144.803,89.664 C20.2@144.803,92.84 ; C24.2@156.459,29.211 157.733,29.211 158.732,28.212 C61.2@159.636,28.212 DA10.1@161.653,28.212 ; C17.2@156.632,64.394 156.632,65.43 156.866,65.664 C16.2@156.866,66.426 ; C11.2@168.042,72.268 168.042,71.252 168.296,70.998 C21.2@168.296,69.875 ; C9.2@186.584,93.096 187.346,93.096 187.6,92.842 C10.2@188.596,92.842 ; C7.2@202.352,8.387 202.352,12.216 C50.2@203.097,12.961 ; C3.2@202.352,41.153 202.352,44.982 C4.2@202.97,45.6 ; C2.2@202.352,74.173 202.352,78.002 C1.2@202.97,78.62
  other v3: 209.571,4.196 89.027,61.595
  other v4: 191.77,4.191 197.358,4.191 202.184,4.191 194.31,7.62 191.77,11.176 197.231,11.303 193.294,28.575 152.4,28.829 175.768,28.956 166.751,29.083 172.466,29.083 201.041,29.718 191.516,30.734 132.715,31.75 135.255,31.75 166.751,32.512 191.516,33.02 201.041,33.02 68.326,33.909 71.755,33.909 135.255,34.29 97.79,34.925 152.527,35.052 156.718,35.052 162.306,35.052 69.723,35.306 114.935,35.306 132.715,35.56 140.462,35.941 71.755,36.449 97.79,36.83 114.935,37.719 142.24,37.719 97.79,38.735 136.144,39.751 140.462,39.751 144.272,39.751 118.491,42.545 119.888,42.545 97.79,43.434 99.695,43.434 64.008,43.688 54.356,43.815 60.325,45.339 99.695,45.593 54.356,46.99 60.325,48.387 64.008,49.022 64.008,56.515 54.356,61.722 60.325,63.373 162.306,64.008 54.356,65.024 60.325,65.659 162.306,66.421 170.942,66.675 174.752,66.675 54.356,78.232 60.325,78.232 54.356,81.661 60.325,81.661
gnda: C34.2 C35.2 C36.2 C37.2 DD8.20 R144.2 | length 15
  Top Layer w0.203: v2(109.855,50.292) 109.855,47.244 110.617,46.482 111.125,46.482 111.481,46.126 DD8.20@111.481,45.339
  Bottom Layer w0.508: R144.2@108.074,52.449 108.074,51.819 108.714,51.179 C34.2@108.714,50.289 C35.2@111,50.289 C36.2@113.159,50.289 C37.2@115.318,50.289
j2: J2.1 X2.6 | length 3.3
  Bottom Layer w0.813: X2.6@2.282,73.817 J2.1@2.282,77.092
j3: J3.1 X3.6 | length 3.3
  Bottom Layer w0.813: X3.6@2.282,60.228 J3.1@2.282,63.503
j4: J4.1 X4.6 | length 3.5
  Bottom Layer w0.813: X4.6@2.282,46.512 J4.1@2.282,50.041
j5: J5.1 X5.6 | length 3.4
  Bottom Layer w0.813: X5.6@2.282,33.05 J5.1@2.282,36.452
j6: J6.1 X26.6 | length 2.9
  Bottom Layer w0.813: J6.1@215.413,84.306 X26.6@215.413,87.254
j7: J7.1 X27.6 | length 3
  Bottom Layer w0.813: J7.1@215.413,70.767 X27.6@215.413,73.792
j8: J8.1 X28.6 | length 2.8
  Bottom Layer w0.813: J8.1@215.413,57.382 X28.6@215.413,60.203
j9: J9.1 X29.6 | length 3
  Bottom Layer w0.813: J9.1@215.413,43.589 X29.6@215.413,46.614
j10: J10.1 X30.6 | length 3.2
  Bottom Layer w0.813: J10.1@215.413,30 X30.6@215.413,33.025 X30.6@215.413,33.152
j13_2: J13.2 R206.1 | length 2.5
  Bottom Layer w0.508: J13.2@86.487,49.911 86.487,52.424 R206.1@86.489,52.426
j25: J25.1 X24.6 | length 3.5
  Bottom Layer w0.813: X24.6@2.307,19.309 2.409,19.411 J25.1@2.409,22.736
j26: J26.1 X25.6 | length 2.8
  Bottom Layer w0.813: X25.6@2.282,6.253 J26.1@2.282,9.02
j27-1: J27.1 R201.2 | length 3.1
  Top Layer w0.508: J27.1@160.655,13.97 161.544,13.97 162.557,12.957 R201.2@163.324,12.957
j28-1: J28.1 R202.2 | length 3.3
  Top Layer w0.508: R202.2@135.634,14.094 J28.1@138.935,14.094
mk10: DD8.10 pad.20 | length 1.9
  Top Layer w0.203: DD8.10@106.481,45.339 106.481,44.014 106.553,43.942 pad.20@106.553,43.434
mk11: DD8.11 pad.21 | length 4.4
  Top Layer w0.203: pad.21@106.807,41.148 106.807,42.418 107.128,42.739 107.128,44.002 106.981,44.149 DD8.11@106.981,45.339
mk12: DD8.12 R147.1 | length 7.2
  Top Layer w0.203: v2(106.807,39.624) 107.481,40.298 DD8.12@107.481,45.339
  Bottom Layer w0.203: R147.1@105.564,39.624 v2(106.807,39.624)
mk13: DD8.13 R48.1@108.56,39.622 | length 5.9
  Top Layer w0.203: DD8.13@107.981,45.339 107.981,42.195 108.585,41.591 v2(108.585,40.894)
  Bottom Layer w0.203: R48.1@108.56,39.622 v2@108.56,40.869
mk19: DD8.19 pad.19 | length 3
  Top Layer w0.203: DD8.19@110.981,45.339 110.981,43.959 pad.19@112.141,42.799
mk27: DD8.27 pad.18 | length 6.6
  Top Layer w0.203: DD8.27@115.781,47.739 116.557,47.739 117.052,47.244 pad.18@122.174,47.244
mk29: DD8.29 pad.17 | length 6.7
  Top Layer w0.203: DD8.29@115.781,48.739 116.515,48.739 116.694,48.918 117.96,48.918 118.618,48.26 pad.17@122.174,48.26
mk30: DD8.30 pad.16 | length 6.5
  Top Layer w0.203: DD8.30@115.781,49.239 116.516,49.239 116.516,49.271 116.708,49.271 116.713,49.276 118.618,49.276 118.745,49.149 pad.16@122.174,49.149
mk48: DD8.48 R155.1 | length 3.9
  Top Layer w0.203: DD8.48@115.781,58.239 118.31,58.239 118.87,58.799 R155.1@118.87,59.411
mk51: DD8.51 pad.15 | length 2.5
  Top Layer w0.203: DD8.51@113.981,61.039 115.11,61.039 115.443,60.706 pad.15@116.332,60.706
mk52: DD8.52 pad.12 | length 4
  Top Layer w0.203: DD8.52@113.481,61.039 113.481,61.792 113.919,62.23 115.697,62.23 pad.12@116.332,62.865
mk53: DD8.53 pad.13 | length 1.9
  Top Layer w0.203: DD8.53@112.981,61.039 112.981,62.689 pad.13@113.157,62.865
mk54: DD8.54 pad.14 | length 2.5
  Top Layer w0.203: DD8.54@112.481,61.039 112.481,63.332 pad.14@112.649,63.5
mk62: DD8.62 pad.10 | length 1.2
  Top Layer w0.203: DD8.62@108.481,61.039 pad.10@108.481,62.207
mk72: DD8.72 R149.1 X22.4 | length 33.7
  Top Layer w0.203: v1(97.79,60.96) 97.79,62.611 98.679,63.5 102.362,63.5 103.481,62.381 DD8.72@103.481,61.039
  Bottom Layer w0.203: X22.4@90.805,41.783 90.805,43.561 91.567,44.323 92.837,44.323 94.361,45.847 94.361,55.245 97.79,58.674 v1(97.79,60.96) 97.792,60.962 R149.1@97.792,62.332
mk73: DD8.73 pad.11 | length 3.7
  Top Layer w0.203: pad.11@100.711,62.865 102.33,62.865 102.981,62.214 DD8.73@102.981,61.039
mk76: DD8.76 R148.1 X22.2 | length 33.6
  Top Layer w0.203: v1(95.25,60.96) 96.393,60.96 97.028,60.325 98.412,60.325 99.498,59.239 DD8.76@100.181,59.239
  Bottom Layer w0.203: X22.2@85.725,41.783 85.725,43.942 86.614,44.831 92.583,44.831 93.726,45.974 93.726,55.499 95.25,57.023 v1(95.25,60.96) 95.252,60.962 R148.1@95.252,62.332
mk89: DD8.89 R150.1 R151.2 | length 7.2
  Top Layer w0.203: DD8.89@100.181,52.739 101.566,52.739 v1(101.6,52.705)
  Bottom Layer w0.203: R151.2@95.909,52.807 R150.1@99.824,52.807 100.609,52.807 100.711,52.705 v1(101.6,52.705)
mk93: DD8.93 pad.22 | length 5.7
  Top Layer w0.203: pad.22@94.996,49.53 95.885,49.53 97.094,50.739 DD8.93@100.181,50.739
mk97: DD8.97 R152.1 | length 13.6
  Top Layer w0.203: R152.1@87.782,47.369 89.154,47.369 89.914,46.609 95.758,46.609 97.888,48.739 DD8.97@100.181,48.739
mk98: DD8.98 R153.1 | length 13.7
  Top Layer w0.203: R153.1@87.782,45.083 94.994,45.083 98.15,48.239 DD8.98@100.181,48.239
nrst: DD8.14 R129.1 X22.5 X47.5 | length 75.1
  Top Layer w0.203: DD8.14@108.481,45.339 108.481,42.695 109.855,41.321 v1(109.855,41.275)
  Bottom Layer w0.203: X22.5@93.345,42.164 X22.5@93.345,41.783 93.345,41.148 94.107,40.386 97.028,40.386 98.552,41.91 109.22,41.91 v1(109.855,41.275) 111.379,41.275 111.633,41.021 120.369,41.021 124.46,45.112 124.46,62.595 X47.5@137.054,75.189
Out_A: J28.2 R137.2 X51.1 | length 12
  Top Layer w0.813: R137.2@135.379,6.987 135.379,9.014 137.922,11.557 J28.2@138.938,11.557 X51.1@144.272,11.557
Out_b: J27.2 R138.2 X51.3 | length 15
  Top Layer w0.813: X51.3@151.892,11.557 151.892,13.335 152.654,14.097 157.099,14.097 159.766,11.43 J27.2@160.655,11.43 161.417,11.43 162.436,10.411 R138.2@163.32,10.411
pa0: DD7.8 DD8.23 R93.1 | length 91.6
  Top Layer w0.203: DD8.23@112.981,45.339 112.981,44.147 113.694,43.434 130.556,43.434 132.207,41.783 173.609,41.783 176.911,45.085 v1(184.15,45.085)
  Top Layer w0.254: R93.1@193.34,44.453 v1(194.583,44.453) 196.998,46.868 DD7.8@198.522,46.868
  Bottom Layer w0.203: v1(184.15,45.085) 191.773,45.085 192.405,44.453 v1(194.583,44.453)